# EAGLE board Memory Breakout Board (EAGLE 8.6.0)
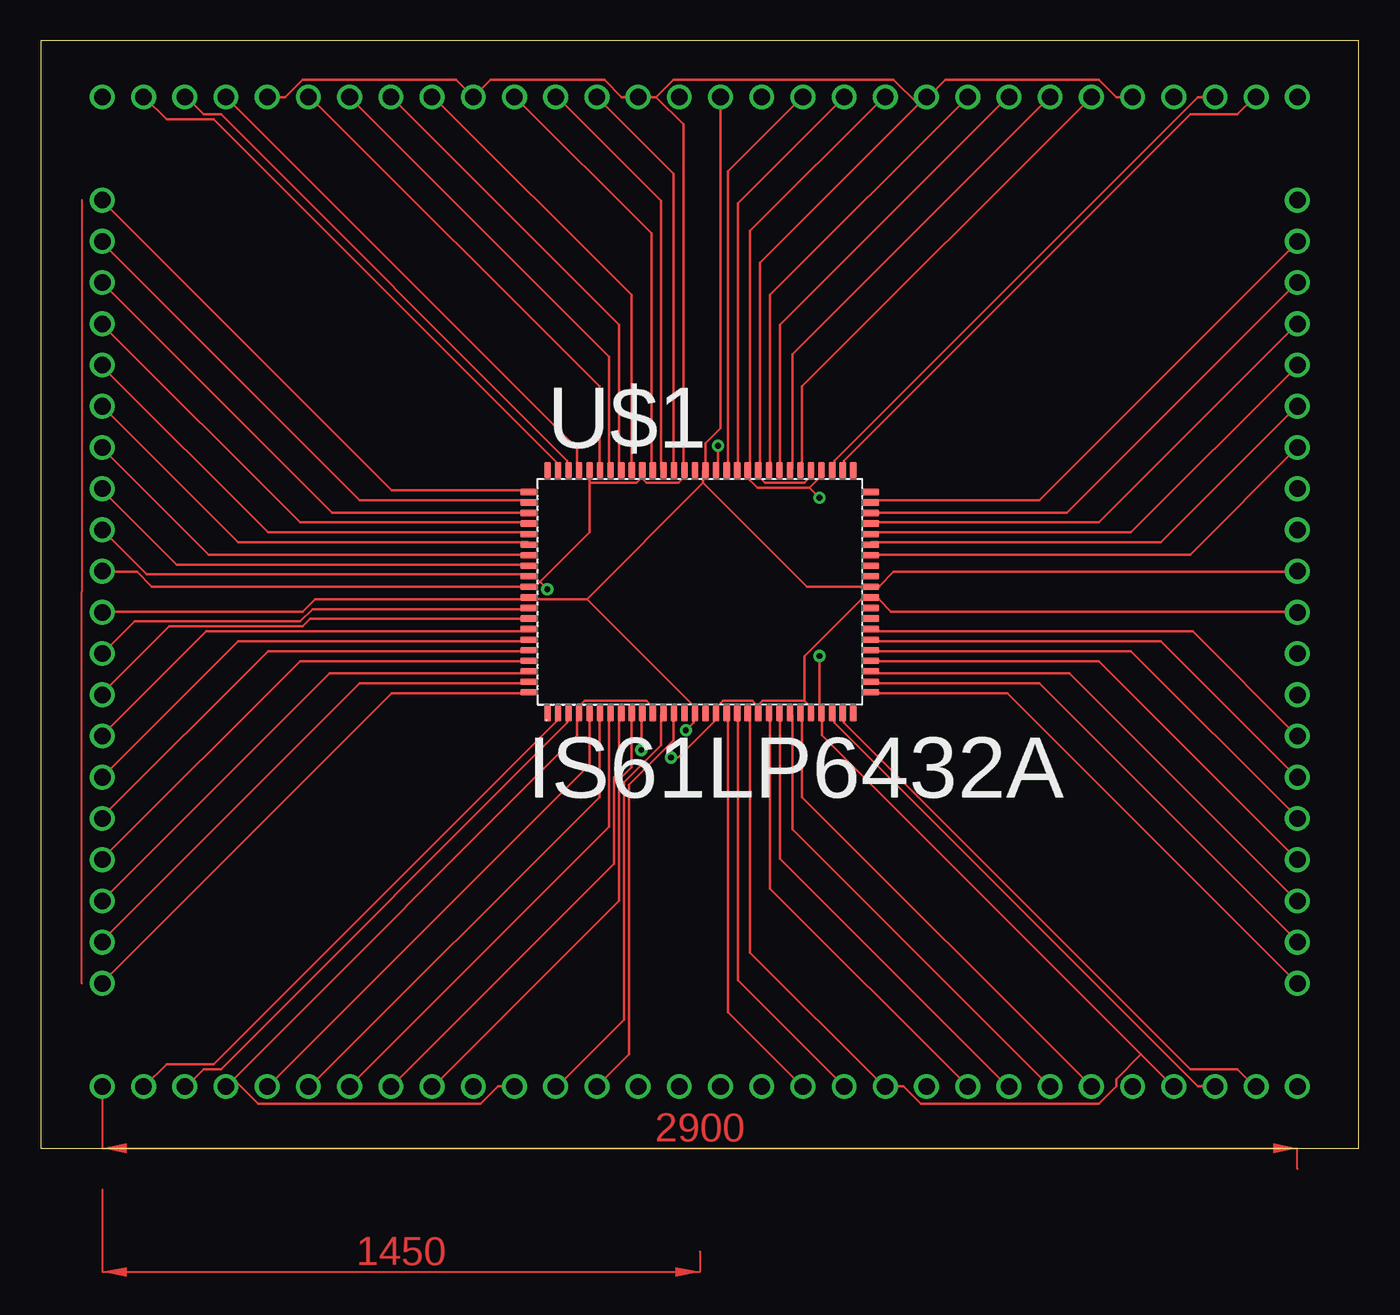
[diagram p0: board, top side]
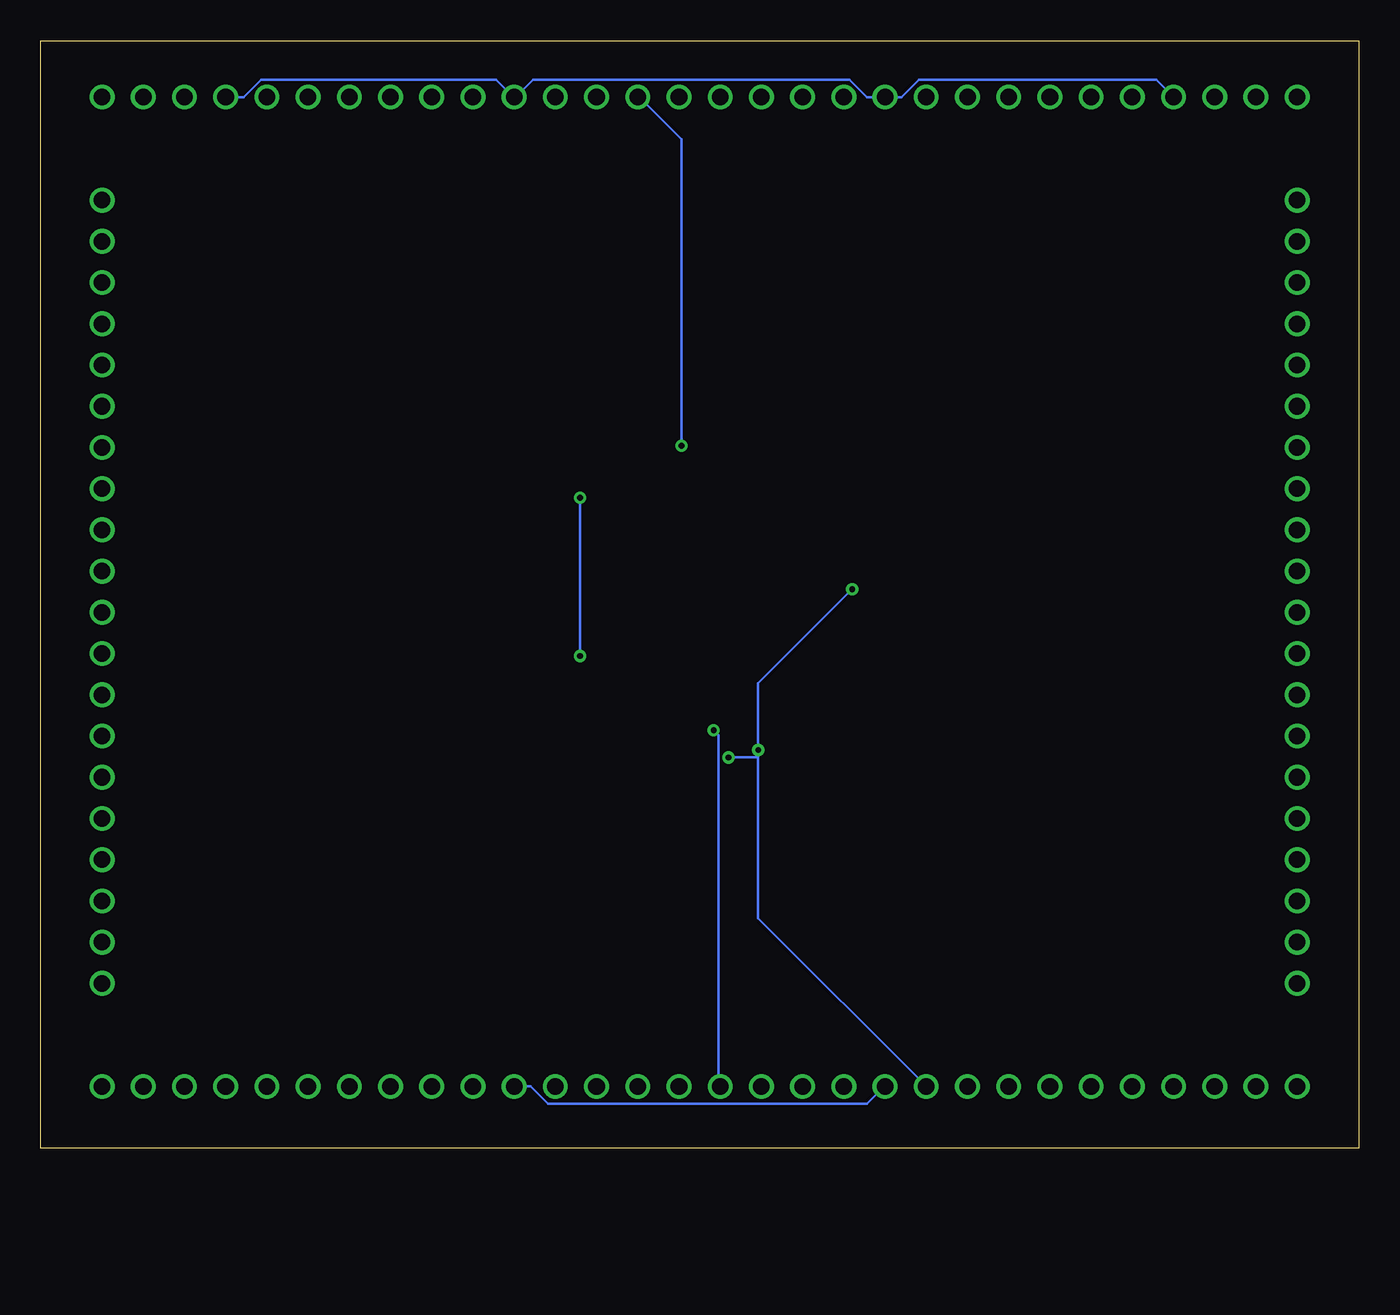
[diagram p1: board, bottom side, seen from below]

Size 81.26 x 68.25 mm. Coordinates in mm from the lower left corner, seen from the top.
Outline: 0,0 81.26,0 81.26,68.25 0,68.25 0,0
Copper layers (1*16): Top 0.035mm / dielectric 1.5mm / Bottom 0.035mm
Design rules "default": minimum track width 6mil, minimum drill 0.35mm, track to track 6mil, track to pad 6mil, pad to pad 6mil, via to via 6mil, smd to smd 6mil, copper to edge 40mil, drill to drill 6mil, minimum pad ring 10mil, minimum via ring 8mil, stop-mask expansion 4mil, vias tented up to drill 0mil, thermal gap 10mil

## Footprints (pad centres in the part's own frame; a part is rotated, then mirrored left to right if it is on the bottom)
IS61LP6432A = smd 0.4 x 1: 1 -9.4,-7.5; 2 -8.75,-7.5; 3 -8.1,-7.5; 4 -7.45,-7.5; 5 -6.8,-7.5; 6 -6.15,-7.5; 7 -5.5,-7.5; 8 -4.85,-7.5; 9 -4.2,-7.5; 10 -3.55,-7.5; 11 -2.9,-7.5; 12 -2.25,-7.5; 13 -1.6,-7.5; 14 -0.95,-7.5; 15 -0.3,-7.5; 16 0.35,-7.5; 17 1,-7.5; 18 1.65,-7.5; 19 2.3,-7.5; 20 2.95,-7.5; 21 3.6,-7.5; 22 4.25,-7.5; 23 4.9,-7.5; 24 5.55,-7.5; 25 6.2,-7.5; 26 6.85,-7.5; 27 7.5,-7.5; 28 8.15,-7.5; 29 8.8,-7.5; 30 9.45,-7.5; 51 9.45,7.5; 52 8.8,7.5; 53 8.15,7.5; 54 7.5,7.5; 55 6.85,7.5; 56 6.2,7.5; 57 5.55,7.5; 58 4.9,7.5; 59 4.25,7.5; 60 3.6,7.5; 61 2.95,7.5; 62 2.3,7.5; 63 1.65,7.5; 64 1,7.5; 65 0.35,7.5; 66 -0.3,7.5; 67 -0.95,7.5; 68 -1.6,7.5; 69 -2.25,7.5; 70 -2.9,7.5; 71 -3.55,7.5; 72 -4.2,7.5; 73 -4.85,7.5; 74 -5.5,7.5; 75 -6.15,7.5; 76 -6.8,7.5; 77 -7.45,7.5; 78 -8.1,7.5; 79 -8.75,7.5; 80 -9.4,7.5 | smd 1 x 0.4: 31 10.55,-6.2; 32 10.55,-5.55; 33 10.55,-4.9; 34 10.55,-4.25; 35 10.55,-3.6; 36 10.55,-2.95; 37 10.55,-2.3; 38 10.55,-1.65; 39 10.55,-1; 40 10.55,-0.35; 41 10.55,0.3; 42 10.55,0.95; 43 10.55,1.6; 44 10.55,2.25; 45 10.55,2.9; 46 10.55,3.55; 47 10.55,4.2; 48 10.55,4.85; 49 10.55,5.5; 50 10.55,6.15; 81 -10.55,6.15; 82 -10.55,5.5; 83 -10.55,4.85; 84 -10.55,4.2; 85 -10.55,3.55; 86 -10.55,2.9; 87 -10.55,2.25; 88 -10.55,1.6; 89 -10.55,0.95; 90 -10.55,0.3; 91 -10.55,-0.35; 92 -10.55,-1; 93 -10.55,-1.65; 94 -10.55,-2.3; 95 -10.55,-2.95; 96 -10.55,-3.6; 97 -10.55,-4.25; 98 -10.55,-4.9; 99 -10.55,-5.55; 100 -10.55,-6.2
HEADER20 = drill 1.02: P$1 -2.54,2.54; P$2 0,2.54; P$3 2.54,2.54; P$4 5.08,2.54; P$5 7.62,2.54; P$6 10.16,2.54; P$7 12.7,2.54; P$8 15.24,2.54; P$9 17.78,2.54; P$10 20.32,2.54; P$11 22.86,2.54; P$12 25.4,2.54; P$13 27.94,2.54; P$14 30.48,2.54; P$15 33.02,2.54; P$16 35.56,2.54; P$17 38.1,2.54; P$18 40.64,2.54; P$19 43.18,2.54; P$20 45.72,2.54
HEADER30 = drill 1.02: P$1 -36.83,0; P$2 -34.29,0; P$3 -31.75,0; P$4 -29.21,0; P$5 -26.67,0; P$6 -24.13,0; P$7 -21.59,0; P$8 -19.05,0; P$9 -16.51,0; P$10 -13.97,0; P$11 -11.43,0; P$12 -8.89,0; P$13 -6.35,0; P$14 -3.81,0; P$15 -1.27,0; P$16 1.27,0; P$17 3.81,0; P$18 6.35,0; P$19 8.89,0; P$20 11.43,0; P$21 13.97,0; P$22 16.51,0; P$23 19.05,0; P$24 21.59,0; P$25 24.13,0; P$26 26.67,0; P$27 29.21,0; P$28 31.75,0; P$29 34.29,0; P$30 36.83,0

## Placement (x,y rotation side)
U$1  IS61LP6432A  [IS61LP6432A]  40.64,34.29 0 top
U$2  HEADER20  [HEADER20]  80.01,12.7 90 top
U$3  HEADER20  [HEADER20]  1.27,55.88 270 top
U$4  HEADER30  [HEADER30]  40.64,3.81 0 top
U$5  HEADER30  [HEADER30]  40.64,64.77 180 top

## Library data of the parts
U$1-U$5 = memory

## Nets
_CE2: U$1.92 U$3.P$12
A6: U$1.100 U$3.P$20
A7: U$1.99 U$3.P$19
A8: U$1.82 U$3.P$2
A9: U$1.81 U$3.P$1
ADSC: U$1.85 U$3.P$5
ADSP: U$1.84 U$3.P$4
ADV: U$1.83 U$3.P$3
BW1: U$1.93 U$3.P$13
BW2: U$1.94 U$3.P$14
BW3: U$1.95 U$3.P$15
BW4: U$1.96 U$3.P$16
BWE: U$1.87 U$3.P$7
CE: U$1.98 U$3.P$18
CE2: U$1.97 U$3.P$17
CLK: U$1.89 U$3.P$9
DBQ8: U$1.79 U$5.P$29
GW: U$1.88 U$3.P$8
N$1: U$1.2 U$4.P$2
N$2: U$1.3 U$4.P$3
N$3: U$1.31 U$2.P$1
N$4: U$1.5 U$4.P$5
N$5: U$1.6 U$4.P$6
N$6: U$1.7 U$4.P$7
N$7: U$1.8 U$4.P$8
N$8: U$1.9 U$4.P$9
N$9: U$1.32 U$2.P$2
N$10: U$1.12 U$4.P$12
N$11: U$1.13 U$4.P$13
N$13: U$1.18 U$4.P$18
N$14: U$1.19 U$4.P$19
N$15: U$1.22 U$4.P$22
N$16: U$1.23 U$4.P$23
N$17: U$1.24 U$4.P$24
N$18: U$1.25 U$4.P$25
N$19: U$1.28 U$4.P$28
N$20: U$1.29 U$4.P$29
N$21: U$1.33 U$2.P$3
N$22: U$1.4 U$1.11 U$1.20 U$1.27 U$1.54 U$1.61 U$1.70 U$1.77 U$4.P$4 U$4.P$11 U$4.P$20 U$4.P$27 U$5.P$4 U$5.P$11 U$5.P$20 U$5.P$27
N$24: U$1.34 U$2.P$4
N$25: U$1.35 U$2.P$5
N$26: U$1.36 U$2.P$6
N$27: U$1.37 U$2.P$7
N$28: U$1.44 U$2.P$14
N$29: U$1.45 U$2.P$15
N$30: U$1.46 U$2.P$16
N$31: U$1.47 U$2.P$17
N$32: U$1.48 U$2.P$18
N$33: U$1.49 U$2.P$19
N$34: U$1.52 U$5.P$2
N$35: U$1.53 U$5.P$3
N$36: U$1.56 U$5.P$6
N$37: U$1.57 U$5.P$7
N$38: U$1.58 U$5.P$8
N$39: U$1.59 U$5.P$9
N$40: U$1.62 U$5.P$12
N$41: U$1.63 U$5.P$13
N$42: U$1.64 U$5.P$14
N$43: U$1.68 U$5.P$18
N$44: U$1.69 U$5.P$19
N$45: U$1.72 U$5.P$22
N$46: U$1.73 U$5.P$23
N$47: U$1.74 U$5.P$24
N$48: U$1.75 U$5.P$25
N$49: U$1.78 U$5.P$28
OE: U$1.86 U$3.P$6
VDD: U$1.15 U$1.41 U$1.65 U$1.91 U$2.P$11 U$3.P$11 U$4.P$15 U$5.P$15
VSS: U$1.10 U$1.17 U$1.21 U$1.26 U$1.40 U$1.55 U$1.60 U$1.67 U$1.71 U$1.76 U$1.90 U$2.P$10 U$3.P$10 U$4.P$10 U$5.P$5 U$5.P$10 U$5.P$17 U$5.P$21 U$5.P$26

## Tracks (layer width: path | path; a pad name or v marks a point on that pad's centre or on a via)
_CE2
  Top 0.152: U$3.P$12 5.79,32.46 16,32.46 16.76,33.22 30.02,33.22 U$1.92
A6
  Top 0.152: U$1.100 30.02,28.04 21.64,28.04 3.81,10.21 U$3.P$20
A7
  Top 0.152: U$1.99 30.02,28.65 19.66,28.65 3.81,12.8 U$3.P$19
A8
  Top 0.152: U$1.82 30.02,39.93 19.66,39.93 3.81,55.78 U$3.P$2
A9
  Top 0.152: U$1.81 30.02,40.54 21.64,40.54 3.81,58.37 U$3.P$1
ADSC
  Top 0.152: U$1.85 30.02,37.95 14.02,37.95 3.81,48.16 U$3.P$5
ADSP
  Top 0.152: U$1.84 30.02,38.56 16,38.56 3.81,50.75 U$3.P$4
ADV
  Top 0.152: U$3.P$3 17.98,39.17 30.02,39.17 U$1.83
BW1
  Top 0.152: U$1.93 30.02,32.61 16.61,32.61 16.15,32.16 7.93,32.16 3.81,28.04 U$3.P$13
BW2
  Top 0.152: U$1.94 30.02,31.85 10.21,31.85 3.81,25.45 U$3.P$14
BW3
  Top 0.152: U$3.P$15 12.19,31.24 30.02,31.24 U$1.95
BW4
  Top 0.152: U$1.96 30.02,30.63 14.02,30.63 3.81,20.42 U$3.P$16
BWE
  Top 0.152: U$1.87 30.02,36.58 10.36,36.58 3.81,43.13 U$3.P$7
CE
  Top 0.152: U$3.P$18 17.83,29.26 30.02,29.26 U$1.98
CE2
  Top 0.152: U$1.97 30.02,30.02 16,30.02 3.81,17.83 U$3.P$17
CLK
  Top 0.152: U$3.P$9 6.55,35.36 30.02,35.36 U$1.89
DBQ8
  Top 0.152: U$1.79 31.85,41.91 31.85,42.21 10.67,63.4 7.77,63.4 6.4,64.77 U$5.P$29
GW
  Top 0.152: U$1.88 30.02,35.97 8.38,35.97 3.81,40.54 U$3.P$8
N$1
  Top 0.152: U$1.2 31.85,26.67 31.85,26.36 10.67,5.18 7.77,5.18 6.4,3.81 U$4.P$2
N$2
  Top 0.152: U$1.3 32.46,26.67 32.46,26.21 11.12,4.88 10.06,4.88 8.99,3.81 U$4.P$3
N$3
  Top 0.152: U$2.P$1 59.59,28.04 51.21,28.04 U$1.31
N$4
  Top 0.152: U$1.5 33.83,26.67 33.83,23.62 14.02,3.81 U$4.P$5
N$5
  Top 0.152: U$1.6 34.44,26.67 34.44,21.64 16.61,3.81 U$4.P$6
N$6
  Top 0.152: U$4.P$7 35.05,19.81 35.05,26.67 U$1.7
N$7
  Top 0.152: U$1.8 35.66,26.67 35.66,23.16 35.36,22.86 35.36,17.53 21.64,3.81 U$4.P$8
N$8
  Top 0.152: U$1.9 36.42,26.67 36.42,23.47 35.66,22.71 35.66,15.24 24.23,3.81 U$4.P$9
N$9
  Top 0.152: U$1.32 51.21,28.65 61.57,28.65 77.42,12.8 U$2.P$2
N$10
  Top 0.152: U$1.12 38.25,26.67 38.25,24.84 35.97,22.55 35.97,7.92 31.85,3.81 U$4.P$12
N$11
  Top 0.152: U$4.P$13 36.27,5.79 36.27,22.4 39.01,25.15 39.01,26.67 U$1.13
N$13
  Top 0.152: U$1.18 42.37,26.67 42.37,8.38 46.94,3.81 U$4.P$18
N$14
  Top 0.152: U$4.P$19 42.98,10.36 42.98,26.67 U$1.19
N$15
  Top 0.152: U$4.P$22 44.96,16 44.96,26.67 U$1.22
N$16
  Top 0.152: U$1.23 45.57,26.67 45.57,17.83 59.59,3.81 U$4.P$23
N$17
  Top 0.152: U$1.24 46.33,26.67 46.33,19.66 62.18,3.81 U$4.P$24
N$18
  Top 0.152: U$4.P$25 46.94,21.64 46.94,26.67 U$1.25
N$19
  Top 0.152: U$4.P$28 71.32,3.81 48.92,26.21 48.92,26.67 U$1.28
N$20
  Top 0.152: U$1.29 49.53,26.67 49.53,26.21 70.87,4.88 73.76,4.88 74.83,3.81 U$4.P$29
N$21
  Top 0.152: U$1.33 51.21,29.26 63.4,29.26 77.42,15.24 U$2.P$3
N$22  (via drill 0.35)
  Top 0.152: U$1.20 43.74,26.67 43.74,12.04 51.97,3.81 U$4.P$20 53.19,3.81 54.25,2.74 65.23,2.74 66.29,3.81 66.29,4.27 67.82,5.79 | 67.82,5.79 69.8,3.81 U$4.P$27 | 67.82,5.79 48.16,25.45 48.16,26.67 U$1.27 48.01,26.82 v48.01,30.33 | U$1.11 37.64,26.82 37.64,27.28 37.34,27.58 33.53,27.58 33.22,27.28 33.22,26.82 U$1.4 33.07,26.67 33.07,25.45 11.89,4.27 | U$4.P$11 28.19,3.81 27.13,2.74 13.41,2.74 11.89,4.27 | 11.89,4.27 U$4.P$4 | U$1.70 37.64,41.91 37.64,56.39 29.26,64.77 U$5.P$20 | U$5.P$27 33.07,43.13 33.07,41.91 U$1.77 | 47.4,40.69 44.2,40.69 43.74,41.15 43.74,41.76 U$1.61 43.74,41.91 43.74,56.54 51.97,64.77 U$5.P$11 | 47.4,40.69 48.01,41.3 48.01,41.76 U$1.54 | 47.4,40.69 v48.01,40.08
  Bottom 0.152: U$4.P$20 51.05,3.81 49.99,2.74 30.33,2.74 29.26,3.81 U$4.P$11 | U$5.P$27 12.5,65.84 27.13,65.84 28.19,64.77 U$5.P$20 30.33,64.77 31.39,65.84 50.9,65.84 51.97,64.77 U$5.P$11 52.12,64.77 53.19,65.84 67.67,65.84 68.73,64.77 U$5.P$4 | v48.01,40.08 v48.01,30.33
N$24
  Top 0.152: U$2.P$4 65.23,30.02 51.21,30.02 U$1.34
N$25
  Top 0.152: U$1.35 51.21,30.63 67.21,30.63 77.42,20.42 U$2.P$5
N$26
  Top 0.152: U$1.36 51.21,31.24 69.04,31.24 77.42,22.86 U$2.P$6
N$27
  Top 0.152: U$2.P$7 71.02,31.85 51.21,31.85 U$1.37
N$28
  Top 0.152: U$2.P$14 70.87,36.58 51.21,36.58 U$1.44
N$29
  Top 0.152: U$1.45 51.21,37.34 69.04,37.34 77.42,45.72 U$2.P$15
N$30
  Top 0.152: U$1.46 51.21,37.95 67.21,37.95 77.42,48.16 U$2.P$16
N$31
  Top 0.152: U$2.P$17 65.23,38.56 51.21,38.56 U$1.47
N$32
  Top 0.152: U$1.48 51.21,39.17 63.25,39.17 77.42,53.34 U$2.P$18
N$33
  Top 0.152: U$1.49 51.21,39.93 61.57,39.93 77.42,55.78 U$2.P$19
N$34
  Top 0.152: U$1.52 49.53,41.91 49.53,42.37 70.87,63.7 73.76,63.7 74.83,64.77 U$5.P$2
N$35
  Top 0.152: U$5.P$3 71.32,64.77 48.92,42.37 48.92,41.91 U$1.53
N$36
  Top 0.152: U$5.P$6 46.94,46.94 46.94,41.91 U$1.56
N$37
  Top 0.152: U$1.57 46.33,41.91 46.33,48.92 62.18,64.77 U$5.P$7
N$38
  Top 0.152: U$1.58 45.57,41.91 45.57,50.75 59.59,64.77 U$5.P$8
N$39
  Top 0.152: U$5.P$9 44.96,52.58 44.96,41.91 U$1.59
N$40
  Top 0.152: U$5.P$12 42.98,58.22 42.98,41.91 U$1.62
N$41
  Top 0.152: U$1.63 42.37,41.91 42.37,60.2 46.94,64.77 U$5.P$13
N$42  (via drill 0.35)
  Top 0.152: v41.76,43.28 41.76,41.91 U$1.64
  Bottom 0.152: v41.76,43.28 41.76,62.18 44.35,64.77 U$5.P$14
N$43
  Top 0.152: U$5.P$18 39.01,60.05 39.01,41.91 U$1.68
N$44
  Top 0.152: U$1.69 38.25,41.91 38.25,58.37 31.85,64.77 U$5.P$19
N$45
  Top 0.152: U$1.72 36.42,41.91 36.42,52.58 24.23,64.77 U$5.P$22
N$46
  Top 0.152: U$1.73 35.66,41.91 35.66,50.75 21.64,64.77 U$5.P$23
N$47
  Top 0.152: U$5.P$24 35.05,48.77 35.05,41.91 U$1.74
N$48
  Top 0.152: U$1.75 34.44,41.91 34.44,46.94 16.61,64.77 U$5.P$25
N$49
  Top 0.152: U$1.78 32.46,41.91 32.46,42.37 11.12,63.7 10.06,63.7 8.99,64.77 U$5.P$28
OE
  Top 0.152: U$3.P$6 12.19,37.34 30.02,37.34 U$1.86
VDD  (via drill 0.35)
  Top 0.152: 33.68,33.83 30.17,33.83 U$1.91 30.02,33.83 16.92,33.83 16.15,33.07 3.81,33.07 U$3.P$11 | 33.68,33.83 40.23,27.28 40.23,26.82 U$1.15 40.23,26.67 40.23,26.21 v39.78,25.76 | 40.84,41 40.84,41.76 U$1.65 41,41.91 41,43.43 41.91,44.35 U$5.P$15 | 33.68,33.83 40.84,41 | 40.84,41 47.24,34.59 51.05,34.59 U$1.41 51.21,34.59 51.66,34.59 52.58,35.51 77.42,35.51 U$2.P$11
  Bottom 0.152: v39.78,25.76 39.47,25.45 39.47,3.81 U$4.P$15
VSS  (via drill 0.35)
  Top 0.152: 44.2,27.28 43.89,27.58 42.06,27.58 41.76,27.28 41.76,26.82 U$1.17 41.61,26.67 41.61,26.36 39.32,24.08 v38.86,24.08 | 44.2,27.28 44.2,26.82 U$1.21 44.2,27.28 | 47.09,27.58 47.4,27.28 47.4,26.82 U$1.26 | 47.09,27.58 44.5,27.58 44.2,27.28 | 47.09,27.58 47.09,30.33 50.6,33.83 51.05,33.83 U$1.40 51.21,33.83 51.66,33.83 52.43,33.07 77.42,33.07 U$2.P$10 | v37.03,24.54 37.03,26.67 U$1.10 | 30.78,34.9 33.83,37.95 33.83,41 | 30.78,34.9 30.48,34.59 30.17,34.59 U$1.90 30.02,34.59 6.86,34.59 5.94,35.51 3.81,35.51 U$3.P$10 | 33.83,41 33.83,41.76 U$1.76 | 37.03,41.3 37.03,41.76 U$1.71 37.03,41.3 | 37.03,41.3 36.73,41 33.83,41 | 37.03,41.3 37.34,41 39.32,41 39.62,41.3 39.62,41.76 U$1.67 39.62,41.91 39.62,63.09 37.95,64.77 | U$5.P$26 15.09,64.77 16.15,65.84 25.6,65.84 U$5.P$21 27.74,65.84 34.75,65.84 35.81,64.77 U$5.P$17 37.95,64.77 | U$1.55 47.4,41.76 47.4,41.3 47.09,41 44.65,41 44.35,41.3 44.35,41.76 U$1.60 44.35,41.91 44.35,54.56 54.1,64.31 | 54.1,64.31 54.56,64.77 U$5.P$10 | U$5.P$5 66.29,64.77 65.23,65.84 55.78,65.84 54.71,64.77 U$5.P$10 | 37.95,64.77 39.01,65.84 52.58,65.84 54.1,64.31 | 54.1,64.31 U$5.P$10 | 30.78,34.9 v31.24,34.44
  Bottom 0.152: 37.03,24.08 37.03,14.17 U$4.P$10 | 37.03,24.08 v37.03,24.54 37.03,28.65 v31.24,34.44 | 37.03,24.08 v38.86,24.08
(copper drawn outside any net)
  shapes: Top area x4